# EAGLE board adcclean (EAGLE 6.1)
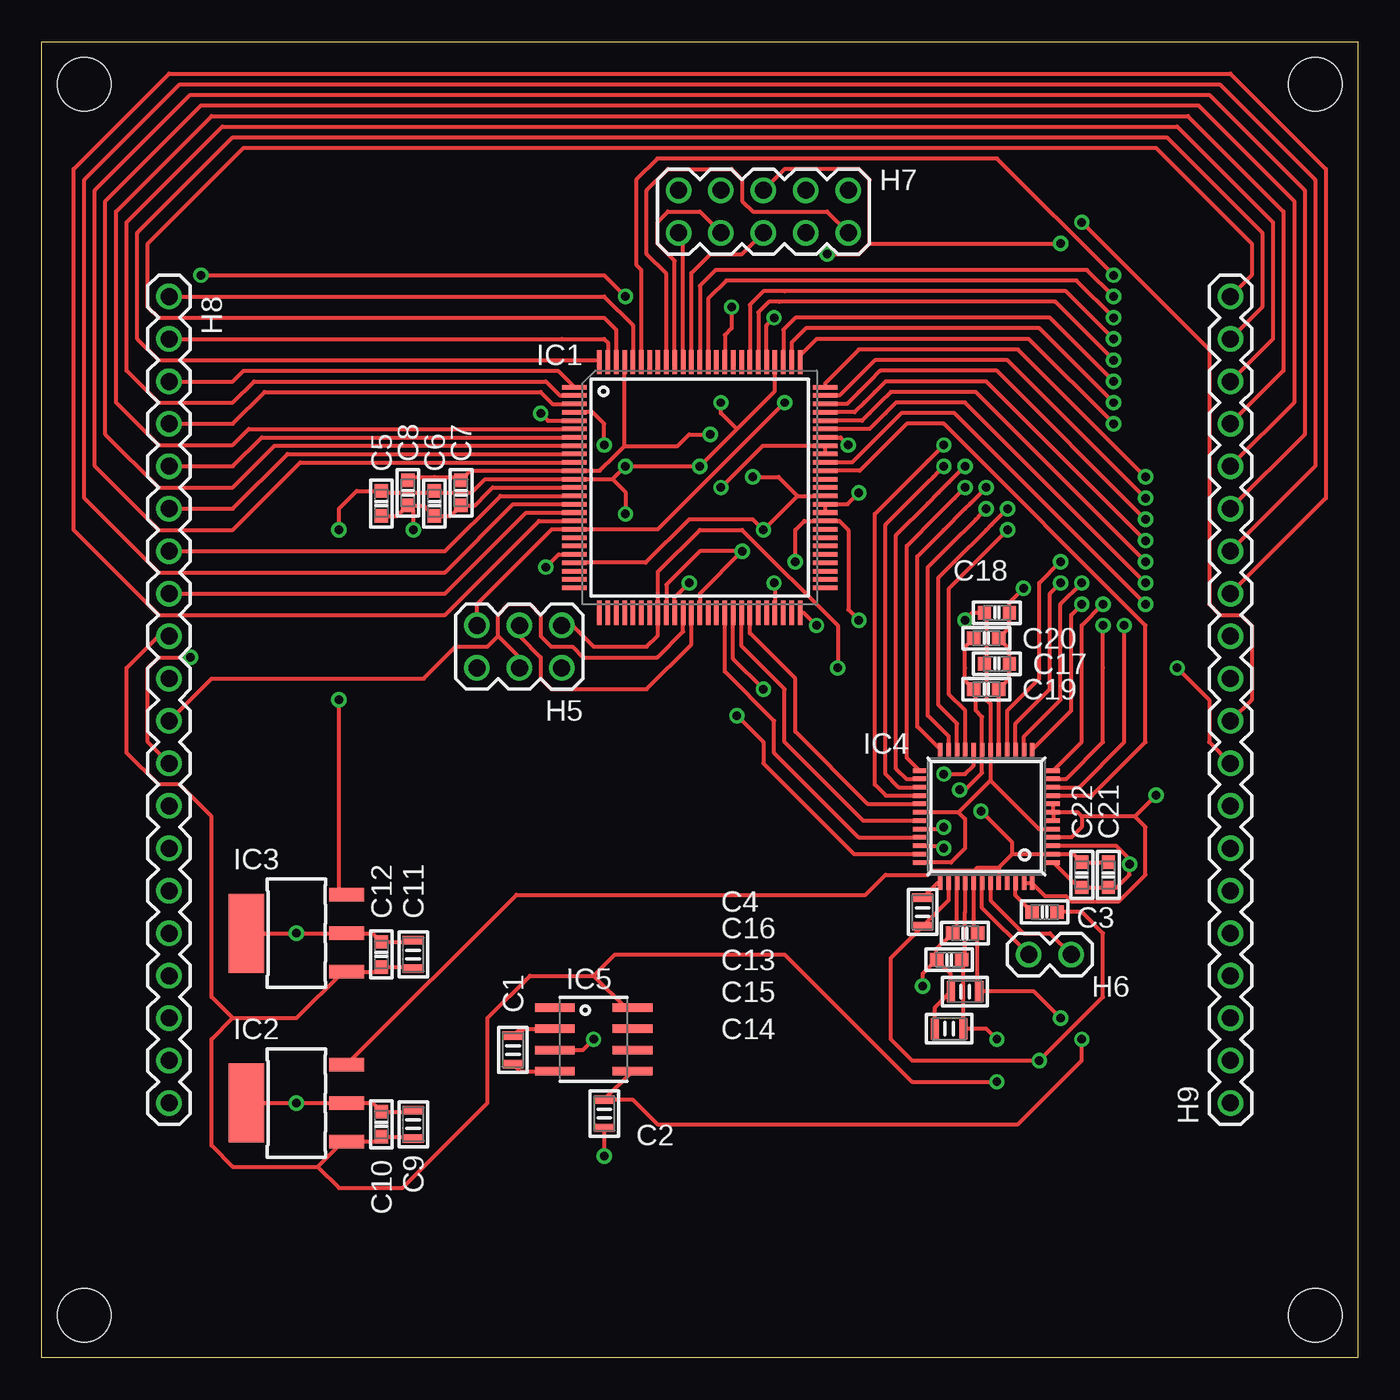
[diagram p0: board, top side]
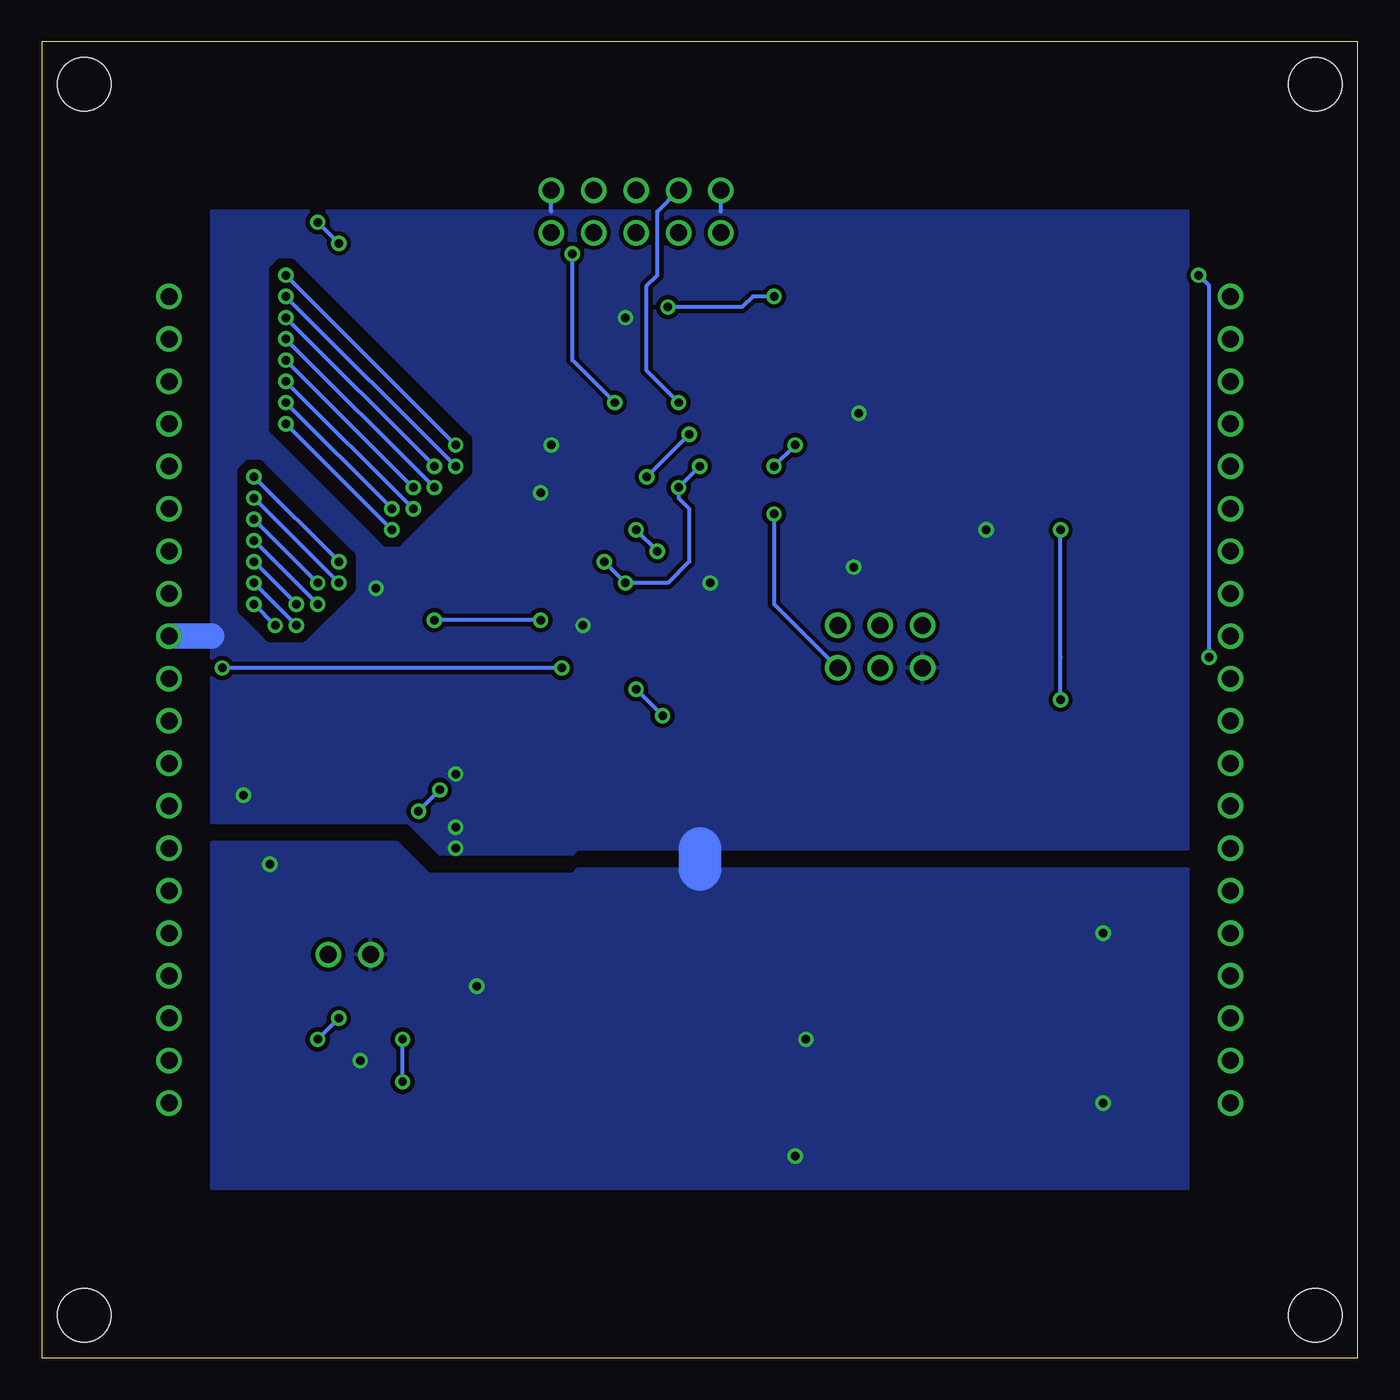
[diagram p1: board, bottom side, seen from below]

Size 78.74 x 78.74 mm. Coordinates in mm from the lower left corner, seen from the top.
Outline: 0,78.74 78.74,78.74 78.74,0 0,0 0,78.74
Copper layers (1*16): Top 0.035mm / dielectric 1.5mm / Bottom 0.035mm
Design rules: minimum track width 8mil, minimum drill 20mil, track to track 8mil, track to pad 8mil, pad to pad 9mil, via to via 8mil, smd to smd 8mil, copper to edge 40mil, drill to drill 8mil, minimum pad ring 10mil, minimum via ring 8mil, stop-mask expansion 4mil, vias tented up to drill 0mil, thermal gap 10mil
Holes 3.2 mm at 2.54,76.2 76.2,76.2 76.2,2.54 2.54,2.54
bRestrict: 16 lines

## Footprints (pad centres in the part's own frame; a part is rotated, then mirrored left to right if it is on the bottom)
CAP-0805 = smd 0.5 x 1.25: 1 -0.85,0; 2 0.85,0
CAP-0603 = smd 0.8 x 0.8: 1 -0.75,0; 2 0.75,0
HM3X2-PTH = drill 1.016: 1 -2.54,1.27; 2 0,1.27; 3 2.54,1.27; 4 2.54,-1.27; 5 0,-1.27; 6 -2.54,-1.27
HM2X1-PTH = drill 1.016: 1 -1.27,0; 2 1.27,0
HM5X2-PTH = drill 1.016: 1 -5.08,1.27; 2 -2.54,1.27; 3 0,1.27; 4 2.54,1.27; 5 5.08,1.27; 6 5.08,-1.27; 7 2.54,-1.27; 8 0,-1.27; 9 -2.54,-1.27; 10 -5.08,-1.27
HM20X1-PTH = drill 1.016: 1 -24.13,0; 2 -21.59,0; 3 -19.05,0; 4 -16.51,0; 5 -13.97,0; 6 -11.43,0; 7 -8.89,0; 8 -6.35,0; 9 -3.81,0; 10 -1.27,0; 11 1.27,0; 12 3.81,0; 13 6.35,0; 14 8.89,0; 15 11.43,0; 16 13.97,0; 17 16.51,0; 18 19.05,0; 19 21.59,0; 20 24.13,0
TQFP-100 = smd 1.45 x 0.27: 1 -7.5,6; 2 -7.5,5.5; 3 -7.5,5; 4 -7.5,4.5; 5 -7.5,4; 6 -7.5,3.5; 7 -7.5,3; 8 -7.5,2.5; 9 -7.5,2; 10 -7.5,1.5; 11 -7.5,1; 12 -7.5,0.5; 13 -7.5,0; 14 -7.5,-0.5; 15 -7.5,-1; 16 -7.5,-1.5; 17 -7.5,-2; 18 -7.5,-2.5; 19 -7.5,-3; 20 -7.5,-3.5; 21 -7.5,-4; 22 -7.5,-4.5; 23 -7.5,-5; 24 -7.5,-5.5; 25 -7.5,-6; 51 7.5,-6; 52 7.5,-5.5; 53 7.5,-5; 54 7.5,-4.5; 55 7.5,-4; 56 7.5,-3.5; 57 7.5,-3; 58 7.5,-2.5; 59 7.5,-2; 60 7.5,-1.5; 61 7.5,-1; 62 7.5,-0.5; 63 7.5,0; 64 7.5,0.5; 65 7.5,1; 66 7.5,1.5; 67 7.5,2; 68 7.5,2.5; 69 7.5,3; 70 7.5,3.5; 71 7.5,4; 72 7.5,4.5; 73 7.5,5; 74 7.5,5.5; 75 7.5,6 | smd 0.27 x 1.45: 26 -6,-7.5; 27 -5.5,-7.5; 28 -5,-7.5; 29 -4.5,-7.5; 30 -4,-7.5; 31 -3.5,-7.5; 32 -3,-7.5; 33 -2.5,-7.5; 34 -2,-7.5; 35 -1.5,-7.5; 36 -1,-7.5; 37 -0.5,-7.5; 38 0,-7.5; 39 0.5,-7.5; 40 1,-7.5; 41 1.5,-7.5; 42 2,-7.5; 43 2.5,-7.5; 44 3,-7.5; 45 3.5,-7.5; 46 4,-7.5; 47 4.5,-7.5; 48 5,-7.5; 49 5.5,-7.5; 50 6,-7.5; 76 6,7.5; 77 5.5,7.5; 78 5,7.5; 79 4.5,7.5; 80 4,7.5; 81 3.5,7.5; 82 3,7.5; 83 2.5,7.5; 84 2,7.5; 85 1.5,7.5; 86 1,7.5; 87 0.5,7.5; 88 0,7.5; 89 -0.5,7.5; 90 -1,7.5; 91 -1.5,7.5; 92 -2,7.5; 93 -2.5,7.5; 94 -3,7.5; 95 -3.5,7.5; 96 -4,7.5; 97 -4.5,7.5; 98 -5,7.5; 99 -5.5,7.5; 100 -6,7.5
SOT-223-4 = smd 2.11 x 0.81: 1 -3,2.3; 2 -3,0; 3 -3,-2.3 | smd 2.11 x 4.72: 4 3,0
LQFP-48 = smd 0.8 x 0.269: 1 -4,2.75; 2 -4,2.25; 3 -4,1.75; 4 -4,1.25; 5 -4,0.75; 6 -4,0.25; 7 -4,-0.25; 8 -4,-0.75; 9 -4,-1.25; 10 -4,-1.75; 11 -4,-2.25; 12 -4,-2.75; 25 4,-2.75; 26 4,-2.25; 27 4,-1.75; 28 4,-1.25; 29 4,-0.75; 30 4,-0.25; 31 4,0.25; 32 4,0.75; 33 4,1.25; 34 4,1.75; 35 4,2.25; 36 4,2.75 | smd 0.269 x 0.8: 13 -2.75,-4; 14 -2.25,-4; 15 -1.75,-4; 16 -1.25,-4; 17 -0.75,-4; 18 -0.25,-4; 19 0.25,-4; 20 0.75,-4; 21 1.25,-4; 22 1.75,-4; 23 2.25,-4; 24 2.75,-4; 37 2.75,4; 38 2.25,4; 39 1.75,4; 40 1.25,4; 41 0.75,4; 42 0.25,4; 43 -0.25,4; 44 -0.75,4; 45 -1.25,4; 46 -1.75,4; 47 -2.25,4; 48 -2.75,4
SOIC-8 = smd 2.388 x 0.5: 1 -2.324,1.905; 2 -2.324,0.635; 3 -2.324,-0.635; 4 -2.324,-1.905; 5 2.324,-1.905; 6 2.324,-0.635; 7 2.324,0.635; 8 2.324,1.905

## Placement (x,y rotation side)
C1  10 uF  [CAP-0805]  28.19,18.41 90 top
C2  10 uF  [CAP-0805]  33.66,14.61 270 top
C3  100 nF  [CAP-0603]  60.01,26.67 0 top
C4  22 uF  [CAP-0805]  52.71,26.67 270 top
C5  4.7 uF  [CAP-0603]  20.32,51.12 90 top
C6  1 nF  [CAP-0603]  23.5,51.12 90 top
C7  470 pF  [CAP-0603]  25.08,51.75 270 top
C8  2.2 uF  [CAP-0603]  21.91,51.75 270 top
C9  22 uF  [CAP-0805]  22.22,13.97 270 top
C10  0.1 uF  [CAP-0603]  20.32,13.97 270 top
C11  22 uF  [CAP-0805]  22.22,24.13 270 top
C12  0.1 uF  [CAP-0603]  20.32,24.13 270 top
C13  0.1 uF  [CAP-0603]  54.29,23.81 0 top
C14  10 uF  [CAP-0805]  54.29,19.68 0 top
C15  10 uF  [CAP-0805]  55.25,21.91 0 top
C16  0.1 uF  [CAP-0603]  55.25,25.4 0 top
C17  0.1 uF  [CAP-0603]  57.15,41.53 180 top
C18  10 uF  [CAP-0603]  57.15,44.58 180 top
C19  0.1 uF  [CAP-0603]  56.52,40.01 180 top
C20  10 uF  [CAP-0603]  56.52,43.05 180 top
C21  0.1 uF  [CAP-0603]  63.82,28.89 270 top
C22  10 uF  [CAP-0603]  62.23,28.89 270 top
H5  HM3X2-PTH  [HM3X2-PTH]  28.57,42.55 180 top
H6  H2X1-PTH  [HM2X1-PTH]  60.33,24.13 180 top
H7  HM5X2-PTH  [HM5X2-PTH]  43.18,68.58 180 top
H8  HM20X1-PTH  [HM20X1-PTH]  7.62,39.37 270 top
H9  HM20X1-PTH  [HM20X1-PTH]  71.12,39.37 90 top
IC1  AT32UC3A-TQFP-100  [TQFP-100]  39.37,52.07 0 top
IC2  5V  [SOT-223-4]  15.24,15.24 180 top
IC3  3.3V  [SOT-223-4]  15.24,25.4 180 top
IC4  AD7612-TQFP-48  [LQFP-48]  56.52,32.38 180 top
IC5  TC7662B-SOIC-8  [SOIC-8]  33.02,19.05 0 top

## Library data of the parts
C1 C2 C4 C9 C11 C14 C15 H5-H9 = august24
C3 C5-C8 C10 C12 C13 C16-C22 IC1-IC5 = july13b

## Nets
1: H9.20 IC1.98
1.8V: C7.1 C8.1 IC1.11 IC1.22 IC1.34 IC1.38 IC1.62 IC1.97
2: H9.19 IC1.100
3: H9.18 IC1.2
3.3V: C5.2 C6.2 C17.2 C18.2 H5.1 H7.7 IC1.4 IC1.12 IC1.47 IC1.59 IC1.67 IC1.68 IC1.79 IC3.3 IC4.5 IC4.18 IC4.30 IC4.36
4: H9.17 IC1.6
5: H9.16 IC1.8
5V: C19.2 C20.2 C21.1 C22.1 IC2.3 IC4.2 IC4.19 IC4.44
6: H9.15 IC1.10
7: H9.14 IC1.15
8: H9.13 IC1.17
9: C2.2 C3.2 C4.2 C5.1 C6.1 C7.2 C8.2 C9.1 C10.1 C11.1 C12.1 C13.1 C14.1 C15.1 C16.1 C17.1 C18.1 C19.1 C20.1 C21.2 C22.2 H5.3 H6.2 H7.6 H7.10 H9.12 IC1.5 IC1.13 IC1.21 IC1.35 IC1.50 IC1.60 IC1.61 IC1.69 IC1.80 IC2.2 IC2.4 IC3.2 IC3.4 IC4.1 IC4.3 IC4.4 IC4.6 IC4.7 IC4.8 IC4.17 IC4.20 IC4.32 IC4.34 IC4.38 IC4.39 IC4.42 IC4.47 IC4.48 IC5.3
10: H9.11
11: H5.4 H7.8 H9.10 IC1.18
12: H5.6 H9.9 IC1.33
13: H9.8
14: H9.7
15: H9.6
16: H9.5
17: H9.4
18: H9.3
19: H9.2
20: H9.1
21: H8.20
22: H8.19
23: H8.18
24: H8.17
25: H8.16
26: H8.15
27: H8.14
28: H8.13
29: H8.12 IC1.85
30: H5.2 H8.11 IC1.36
31: H8.10
32: C9.2 C10.2 C11.2 C12.2 C13.2 C14.2 H8.9 IC2.1 IC3.1 IC4.40 IC5.8
33: H8.8 IC1.16
34: H8.7 IC1.14
35: H8.6 IC1.9
36: H8.5 IC1.7
37: H8.4 IC1.3
38: H8.3 IC1.1
39: H8.2 IC1.99
40: H8.1 IC1.96
-15V: C2.1 C15.2 C16.2 IC4.41 IC5.5
N$1: H5.5 IC1.37
N$2: C1.2 IC5.2
N$4: IC1.65 IC4.9
N$5: IC1.66 IC4.10
N$6: IC1.70 IC4.11
N$7: IC1.71 IC4.12
N$8: C1.1 IC5.4
N$9: IC1.72 IC4.13
N$10: IC1.73 IC4.14
N$11: IC1.74 IC4.15
N$12: IC1.76 IC4.21
N$13: IC1.77 IC4.22
N$14: IC1.78 IC4.23
N$15: IC1.81 IC4.24
N$16: IC1.82 IC4.25
N$17: IC1.87 IC4.26
N$18: IC1.88 IC4.27
N$19: IC1.95 IC4.28
N$20: IC1.75 IC4.16
N$22: IC1.41 IC4.33
N$23: IC1.44 IC4.29
N$24: IC1.42 IC4.35
N$25: C3.1 IC4.46
N$26: C4.1 IC4.37
N$27: IC1.43 IC4.31
N$28: H6.1 IC4.43
N$29: H7.5 IC1.90
N$30: H7.4 IC1.91
N$31: H7.3 IC1.89
N$32: H7.1 IC1.92

## Tracks (layer width: path | path; a pad name or v marks a point on that pad's centre or on a via)
1
  Top 0.254: IC1.98 34.37,61.52 33.66,62.23 6.98,62.23 6.35,62.87 6.35,66.67 12.06,72.39 66.67,72.39 72.39,66.67 72.39,64.77 H9.20
1.8V  (via drill 0.51)
  Top 0.254: 34.87,54.55 IC1.97 | 34.87,54.55 34.29,53.98 33.39,53.07 IC1.11 25.65,53.07 C7.1 24.88,52.71 23.5,52.71 22.11,52.71 C8.1 | IC1.34 37.37,46.26 39.37,48.26 v41.91,48.26 39.37,45.72 IC1.38 | 45.22,51.57 IC1.62 | 45.22,51.57 v43.18,49.53 42.55,50.17 38.74,50.17 36.14,47.57 IC1.22 | 34.87,54.55 38.05,54.55 38.74,55.25 v40.01,55.25 | v42.55,52.71 44.09,52.71 45.22,51.57
  Bottom 0.254: v43.18,49.53 v41.91,48.26 | v40.01,55.25 v42.55,52.71
2
  Top 0.254: H9.19 73.02,62.87 73.02,67.31 67.31,73.02 11.43,73.02 5.71,67.31 5.71,60.96 6.98,59.69 33.25,59.69 IC1.100
3
  Top 0.254: H9.18 73.66,60.96 73.66,67.94 67.94,73.66 10.79,73.66 5.08,67.94 5.08,59.05 6.98,57.15 11.43,57.15 12.7,58.42 30.16,58.42 31.01,57.57 IC1.2
3.3V  (via drill 0.51)
  Top 0.254: IC4.36 54.4,29.63 55.25,30.48 55.25,31.75 55.25,32.25 54.86,32.63 | IC4.30 54.36,32.63 54.86,32.63 | 54.86,32.63 55.25,33.02 56.77,34.54 | 56.77,34.54 IC4.18 56.77,39.12 56.52,39.37 56.52,41.41 C17.2 56.52,41.64 56.52,43.18 56.52,44.46 C18.2 55.69,44.58 v55.25,44.13 | IC4.5 59.67,31.63 56.77,34.54 | IC1.4 32.97,56.57 33.66,55.88 v33.66,54.61 | 34.16,52.57 IC1.12 26.54,52.57 25.72,51.75 23.61,51.75 C6.2 23.38,51.75 21.91,51.75 20.43,51.75 C5.2 18.85,51.87 17.78,50.8 v17.78,49.53 | 34.16,52.57 v34.93,53.34 v39.37,53.34 41.59,55.56 | IC1.79 43.87,57.84 41.59,55.56 | IC1.67 IC1.68 43.14,54.57 v40.64,52.07 | v40.64,57.15 40.64,56.52 41.59,55.56 | v45.09,47.62 45.09,49.53 45.62,50.07 IC1.59 47.72,50.07 48.26,49.53 48.26,44.77 v48.9,44.13 | IC1.47 43.87,46.3 v43.82,46.36 | v34.93,50.48 34.93,51.8 34.16,52.57 | v17.78,39.37 17.78,28.16 17.78,27.7 IC3.3
  Bottom 0.254: v34.93,53.34 v33.66,54.61 | H7.7 41.91,68.58 41.91,64.77 42.55,64.14 42.55,59.05 v40.64,57.15 | v39.37,53.34 v40.64,52.07 40.64,51.44 40.01,50.8 40.01,47.62 41.28,46.36 v43.82,46.36 v45.09,47.62 | H5.1 34.93,45.09 v34.93,50.48 | v48.9,44.13 v55.25,44.13 | v17.78,39.37 17.78,41.91 v17.78,49.53
4
  Top 0.254: H9.17 74.3,59.05 74.3,68.58 68.58,74.3 10.16,74.3 4.45,68.58 4.45,57.15 6.98,54.61 11.43,54.61 12.39,55.57 IC1.6
5
  Top 0.254: H9.16 74.93,57.15 74.93,69.21 69.21,74.93 9.53,74.93 3.81,69.21 3.81,55.25 6.98,52.07 11.43,52.07 13.93,54.57 IC1.8
5V  (via drill 0.51)
  Top 0.254: C20.2 55.25,42.53 55.25,41.28 55.25,40.53 C19.2 55.88,39.89 55.88,38.74 56.27,38.35 IC4.19 56.27,34.99 55.25,33.97 v54.93,33.97 | 58.08,30.13 IC4.2 61.74,30.13 C22.1 C21.1 | 58.08,30.13 57.79,29.84 57.27,29.32 | 57.27,29.32 IC4.44 | 57.27,29.32 56,29.32 55.82,29.15 53.28,29.15 53.02,28.89 50.48,28.89 49.53,27.94 49.29,27.7 28.4,27.7 IC2.3 | 58.08,30.13 58.08,30.82 v56.2,32.7
  Bottom 0.254: v56.2,32.7 v54.93,33.97
6
  Top 0.254: H9.15 75.56,55.25 75.56,69.85 69.85,75.56 8.89,75.56 3.17,69.85 3.17,53.34 6.98,49.53 11.43,49.53 15.47,53.57 IC1.10
7
  Top 0.254: H9.14 76.2,53.34 76.2,70.48 70.48,76.2 8.26,76.2 2.54,70.48 2.54,51.44 6.98,46.99 24.13,46.99 28.21,51.07 IC1.15
8
  Top 0.254: H9.13 76.83,51.44 76.83,71.12 71.12,76.83 7.62,76.83 1.91,71.12 1.91,49.53 6.98,44.45 24.13,44.45 29.75,50.07 IC1.17
9  (via drill 0.51)
  Top 0.254: IC4.17 C19.1 57.9,40.64 C17.1 57.9,42.42 C20.1 57.9,43.69 C18.1 57.9,45.2 v58.74,46.04 | IC4.20 55.77,35.45 55.25,34.93 v53.98,34.93 | IC4.32 53.86,31.63 v53.98,31.75 | IC4.34 53.82,30.63 v53.98,30.48 | IC4.4 61.62,31.13 62.23,31.75 62.23,32.38 | IC4.7 IC4.8 | IC4.7 IC4.6 | IC4.7 61.98,32.63 62.23,32.38 | 65.41,32.38 62.23,32.38 | 65.41,32.38 v66.67,33.66 | IC4.3 64.3,30.63 65.09,29.84 v65.09,29.53 65.09,28.89 64.34,28.14 C21.2 C22.2 61.69,28.46 IC4.1 | IC1.5 30.29,56.07 v29.84,56.52 | IC1.21 30.93,48.07 v30.16,47.31 | IC1.35 37.87,45.49 v38.74,46.36 | IC1.50 45.6,44.57 v46.36,43.82 | IC1.60 IC1.61 48.21,51.07 v48.9,51.75 | IC1.69 47.8,55.07 v48.26,54.61 | IC1.80 43.37,61.79 v43.82,62.23 | IC1.13 26.99,52.07 26.67,51.75 25.92,51 C7.2 24.45,50.37 C6.1 22.86,51 C8.2 | C8.2 21.27,50.37 C5.1 | C8.2 22.22,50.69 v22.22,49.53 | IC4.42 56.27,26.92 H6.2 | IC4.39 54.77,25.67 C16.1 53.54,24.45 C13.1 | C13.1 54.4,22.96 C15.1 53.44,20.95 C14.1 | C3.2 62.23,26.67 63.5,25.4 63.5,21.59 v59.69,17.78 52.07,17.78 50.8,19.05 50.8,23.91 C4.2 54.27,27.38 IC4.38 | C13.1 52.71,22.97 v52.71,22.22 | IC4.47 IC4.48 60.03,27.62 61.28,27.62 61.6,27.3 64.45,27.3 66.04,28.89 66.04,31.75 65.41,32.38 | IC2.4 v15.24,15.24 IC2.2 19.8,15.24 C10.1 22.12,14.72 C9.1 | IC3.4 v15.24,25.4 IC3.2 19.8,25.4 C12.1 22.12,24.88 C11.1 | C2.2 v33.66,12.06 | IC5.3 32.38,18.41 v33.02,19.05
  Bottom 0.254: 38.1,68.58 H7.6 | 48.26,68.58 H7.10
  Bottom 1.524: 68.58,43.18 H9.12
  Bottom 2.54: 39.37,30.48 39.37,29.21
  pour Bottom (isolate 0.254): 10.16,68.58 68.58,68.58 68.58,32.07 56.83,32.07 54.93,30.16 46.99,30.16 46.67,30.48 10.16,30.48
  pour Bottom (isolate 0.254): 68.58,10.16 10.16,10.16 10.16,29.21 46.67,29.21 46.99,28.89 55.56,28.89 57.47,30.8 68.58,30.8
11  (via drill 0.51)
  Top 0.254: H7.8 44.45,71.12 48.9,71.12 49.53,70.48 49.53,66.67 | 49.53,66.67 48.9,66.04 v46.99,66.04 | H9.10 72.39,39.37 72.39,43.82 71.75,44.45 70.48,44.45 69.85,45.09 69.85,60.33 v62.23,67.94 | 49.53,66.67 v60.96,66.67 | v44.45,57.15 36.87,49.57 IC1.18 30.52,49.57 26.04,45.09 H5.4
  Bottom 0.254: v44.45,57.15 46.99,59.69 v46.99,66.04 | v60.96,66.67 v62.23,67.94
12  (via drill 0.51)
  Top 0.254: H5.6 31.75,43.82 33.02,42.55 36.2,42.55 36.83,43.18 36.87,43.22 IC1.33 36.87,47.03 39.37,49.53 41.91,49.53 47.62,43.82 v47.62,41.28 | H9.9 69.85,36.83 69.85,39.37 v67.94,41.28
  Bottom 0.254: v47.62,41.28 v67.94,41.28
29  (via drill 0.51)
  Top 0.254: v34.93,63.5 33.66,64.77 10.16,64.77 v9.53,64.77 | IC1.85 40.87,61.19 41.28,61.6 v41.28,62.87 | H8.12 6.35,36.83 6.35,41.28 6.98,41.91 v8.89,41.91
  Bottom 0.254: v34.93,63.5 36.2,63.5 36.83,62.87 v41.28,62.87 | v8.89,41.91 8.89,64.14 v9.53,64.77
30
  Top 0.254: H5.2 28.57,41.91 27.3,43.18 | 27.3,43.18 27.3,44.45 27.94,45.09 29.21,45.09 29.84,44.45 29.84,43.18 30.48,42.55 31.75,42.55 32.38,41.91 36.83,41.91 38.37,43.45 IC1.36 | H8.11 10.16,40.64 22.86,40.64 24.77,42.55 26.67,42.55 27.3,43.18
32  (via drill 0.51)
  Top 0.254: IC4.40 55.27,26.69 55.25,26.67 55.25,24.02 C13.2 55.14,23.71 C14.2 56.52,19.68 v57.15,19.05 | C9.2 22.12,13.22 C10.2 20.04,12.94 IC2.1 18.02,12.94 16.51,11.43 | C11.2 22.12,23.38 C12.2 20.04,23.1 IC3.1 18.02,23.1 15.24,20.32 11.43,20.32 | H8.9 6.98,43.18 5.08,41.28 5.08,36.2 6.98,34.29 8.26,34.29 10.16,32.38 10.16,21.59 11.43,20.32 | 11.43,20.32 10.16,19.05 10.16,12.7 11.43,11.43 16.51,11.43 | 16.51,11.43 17.78,10.16 21.59,10.16 25.4,13.97 26.67,15.24 26.67,20.32 29.21,22.86 33.02,22.86 | 33.02,22.86 34.93,20.95 IC5.8 | 33.02,22.86 34.29,24.13 44.45,24.13 52.07,16.51 v57.15,16.51
  Bottom 0.254: v57.15,16.51 v57.15,19.05
33
  Top 0.254: H8.8 24.13,45.72 28.98,50.57 IC1.16
34
  Top 0.254: H8.7 24.13,48.26 27.44,51.57 IC1.14
35
  Top 0.254: H8.6 11.43,50.8 14.7,54.07 IC1.9
36
  Top 0.254: H8.5 11.43,53.34 13.16,55.07 IC1.7
37
  Top 0.254: H8.4 11.43,55.88 13.33,57.79 29.84,57.79 30.56,57.07 IC1.3
38
  Top 0.254: H8.3 8.26,58.42 11.43,58.42 12.06,59.05 30.88,59.05 IC1.1
39
  Top 0.254: IC1.99 33.87,60.75 33.66,60.96 31.11,60.96 H8.2
40
  Top 0.254: IC1.96 35.37,61.79 33.66,63.5 H8.1
-15V  (via drill 0.51)
  Top 0.254: IC4.41 55.77,25.63 C16.2 56,22.01 C15.2 59.37,21.91 v60.96,20.32 | IC5.5 C2.1 35.35,15.46 36.83,13.97 58.42,13.97 62.23,17.78 v62.23,19.05
  Bottom 0.254: v62.23,19.05 v60.96,20.32
N$1
  Top 0.254: H5.5 28.57,43.18 29.84,41.91 29.84,40.64 30.48,40.01 31.75,40.01 36.2,40.01 38.87,42.68 IC1.37
N$2
  Top 0.254: IC5.2 28.61,19.68 C1.2
N$4
  Top 0.254: IC4.9 62.85,33.64 66.04,36.83 66.04,43.82 53.98,55.88 51.75,55.88 48.94,53.07 IC1.65
N$5  (via drill 0.51)
  Top 0.254: v66.04,45.09 54.61,56.52 51.44,56.52 48.49,53.57 IC1.66 | IC4.10 62.08,34.14 64.77,36.83 64.77,42.55 v64.77,43.82
  Bottom 0.254: v64.77,43.82 v66.04,45.09
N$6  (via drill 0.51)
  Top 0.254: IC1.70 49.54,55.57 49.85,55.88 50.48,56.52 51.12,57.15 55.25,57.15 v66.04,46.36 | IC4.11 61.3,34.64 63.5,36.83 63.5,41.28 v63.5,43.82
  Bottom 0.254: v63.5,43.82 v66.04,46.36
N$7  (via drill 0.51)
  Top 0.254: IC1.71 49.09,56.07 49.53,56.52 50.17,57.15 50.8,57.79 55.88,57.79 v66.04,47.62 | IC4.12 62.23,36.85 62.23,37.47 62.23,43.82 v63.5,45.09
  Bottom 0.254: v63.5,45.09 v66.04,47.62
N$8
  Top 0.254: IC5.4 28.61,17.14 C1.1
N$9  (via drill 0.51)
  Top 0.254: IC1.72 48.63,56.57 49.21,57.15 49.85,57.79 50.48,58.42 56.52,58.42 v66.04,48.9 | IC4.13 61.6,38.72 61.6,42.55 61.6,43.18 61.6,44.45 v62.23,45.09
  Bottom 0.254: v62.23,45.09 v66.04,48.9
N$10  (via drill 0.51)
  Top 0.254: IC1.73 48.18,57.07 48.9,57.79 49.53,58.42 50.17,59.05 57.15,59.05 v66.04,50.17 | IC4.14 58.77,37.18 60.96,39.37 60.96,41.91 60.96,42.55 60.96,45.09 v62.23,46.36
  Bottom 0.254: v62.23,46.36 v66.04,50.17
N$11  (via drill 0.51)
  Top 0.254: IC1.74 47.73,57.57 49.85,59.69 57.79,59.69 v66.04,51.44 | IC4.15 58.27,37.95 60.33,40.01 60.33,41.28 60.33,41.91 60.33,45.72 v60.96,46.36
  Bottom 0.254: v60.96,46.36 v66.04,51.44
N$12  (via drill 0.51)
  Top 0.254: IC1.76 45.37,59.98 46.36,60.96 59.05,60.96 v64.14,55.88 | v57.79,49.53 54.29,46.04 54.29,39.69 55.27,38.72 IC4.21
  Bottom 0.254: v57.79,49.53 v64.14,55.88
N$13  (via drill 0.51)
  Top 0.254: IC1.77 44.87,60.75 45.72,61.6 59.69,61.6 v64.14,57.15 | v57.79,50.8 56.83,49.85 56.52,49.53 54.61,47.62 53.66,46.67 53.66,39.05 54.77,37.95 IC4.22
  Bottom 0.254: v57.79,50.8 v64.14,57.15
N$14  (via drill 0.51)
  Top 0.254: IC1.78 44.37,61.52 45.09,62.23 60.33,62.23 v64.14,58.42 | v56.52,50.8 56.2,50.48 55.88,50.17 54.29,48.58 53.02,47.31 53.02,38.42 54.27,37.18 IC4.23
  Bottom 0.254: v56.52,50.8 v64.14,58.42
N$15  (via drill 0.51)
  Top 0.254: IC1.81 42.87,62.55 43.5,63.18 44.13,63.18 60.64,63.18 v64.14,59.69 | v56.52,52.07 55.56,51.12 55.25,50.8 53.98,49.53 52.39,47.94 52.39,37.76 IC4.24
  Bottom 0.254: v56.52,52.07 v64.14,59.69
N$16  (via drill 0.51)
  Top 0.254: IC1.82 42.37,63.01 43.18,63.82 44.45,63.82 61.28,63.82 v64.14,60.96 | IC4.25 51.75,35.9 51.75,48.58 53.66,50.48 54.61,51.44 54.93,51.75 v55.25,52.07
  Bottom 0.254: v55.25,52.07 v64.14,60.96
N$17  (via drill 0.51)
  Top 0.254: 39.87,60.19 IC1.87 39.87,63.37 40.96,64.45 44.77,64.45 61.91,64.45 v64.14,62.23 | IC4.26 51.73,34.64 51.12,35.24 51.12,49.21 53.02,51.12 53.66,51.75 54.29,52.39 v55.25,53.34
  Bottom 0.254: v55.25,53.34 v64.14,62.23
N$18  (via drill 0.51)
  Top 0.254: IC1.88 39.37,64.14 40.32,65.09 45.09,65.09 62.55,65.09 v64.14,63.5 | IC4.27 51.27,34.14 50.48,34.93 50.48,49.85 53.02,52.39 53.34,52.71 53.66,53.02 v53.98,53.34
  Bottom 0.254: v53.98,53.34 v64.14,63.5
N$19  (via drill 0.51)
  Top 0.254: v64.14,64.77 57.15,71.75 36.83,71.75 35.56,70.48 35.56,65.41 35.87,65.09 IC1.95 | IC4.28 50.5,33.64 49.85,34.29 49.85,50.48 53.02,53.66 v53.98,54.61
  Bottom 0.254: v53.98,54.61 v64.14,64.77
N$20  (via drill 0.51)
  Top 0.254: IC1.75 46.87,58.3 48.9,60.33 58.42,60.33 v66.04,52.71 | IC4.16 57.77,38.72 59.69,40.64 59.69,41.28 59.69,46.36 v60.96,47.62
  Bottom 0.254: v60.96,47.62 v66.04,52.71
N$22
  Top 0.254: IC4.33 48.88,31.13 43.82,36.2 43.82,38.1 40.87,41.05 IC1.41
N$23
  Top 0.254: IC1.44 42.37,43.36 45.09,40.64 45.09,37.47 49.42,33.13 IC4.29
N$24  (via drill 0.51)
  Top 0.254: v41.59,38.42 43.18,36.83 43.18,35.56 48.26,30.48 48.61,30.13 IC4.35 | IC1.42 41.37,41.82 v43.18,40.01
  Bottom 0.254: v41.59,38.42 v43.18,40.01
N$25
  Top 0.254: C3.1 58.27,27.66 IC4.46
N$26
  Top 0.254: IC4.37 53.57,28.38 C4.1
N$27
  Top 0.254: IC1.43 41.87,42.59 44.45,40.01 44.45,36.83 49.15,32.13 IC4.31
N$28
  Top 0.254: IC4.43 56.77,27.37 58.74,25.4 60.33,25.4 H6.1
N$29
  Top 0.254: IC1.90 38.37,67.04 H7.5
N$30
  Top 0.254: IC1.91 37.87,65.63 36.83,66.67 36.83,67.94 37.47,68.58 39.37,68.58 H7.4
N$31
  Top 0.254: IC1.89 38.87,64.91 40.01,66.04 41.91,66.04 H7.3
N$32
  Top 0.254: IC1.92 37.37,64.86 36.2,66.04 36.2,69.85 37.47,71.12 41.28,71.12 41.91,70.48 41.91,69.21 42.55,68.58 46.99,68.58 H7.1